# Altium PCB uThermometer.PcbDoc
Units mm, origin at the board's own origin, x right, y up, seen from the top; angles counter-clockwise.
Board outline 80.02 x 40.02 mm, 2 copper layers (Top Layer, Bottom Layer), stack 1.536 mm thick; 54 components, 47 nets, 178 pads, 44 vias.
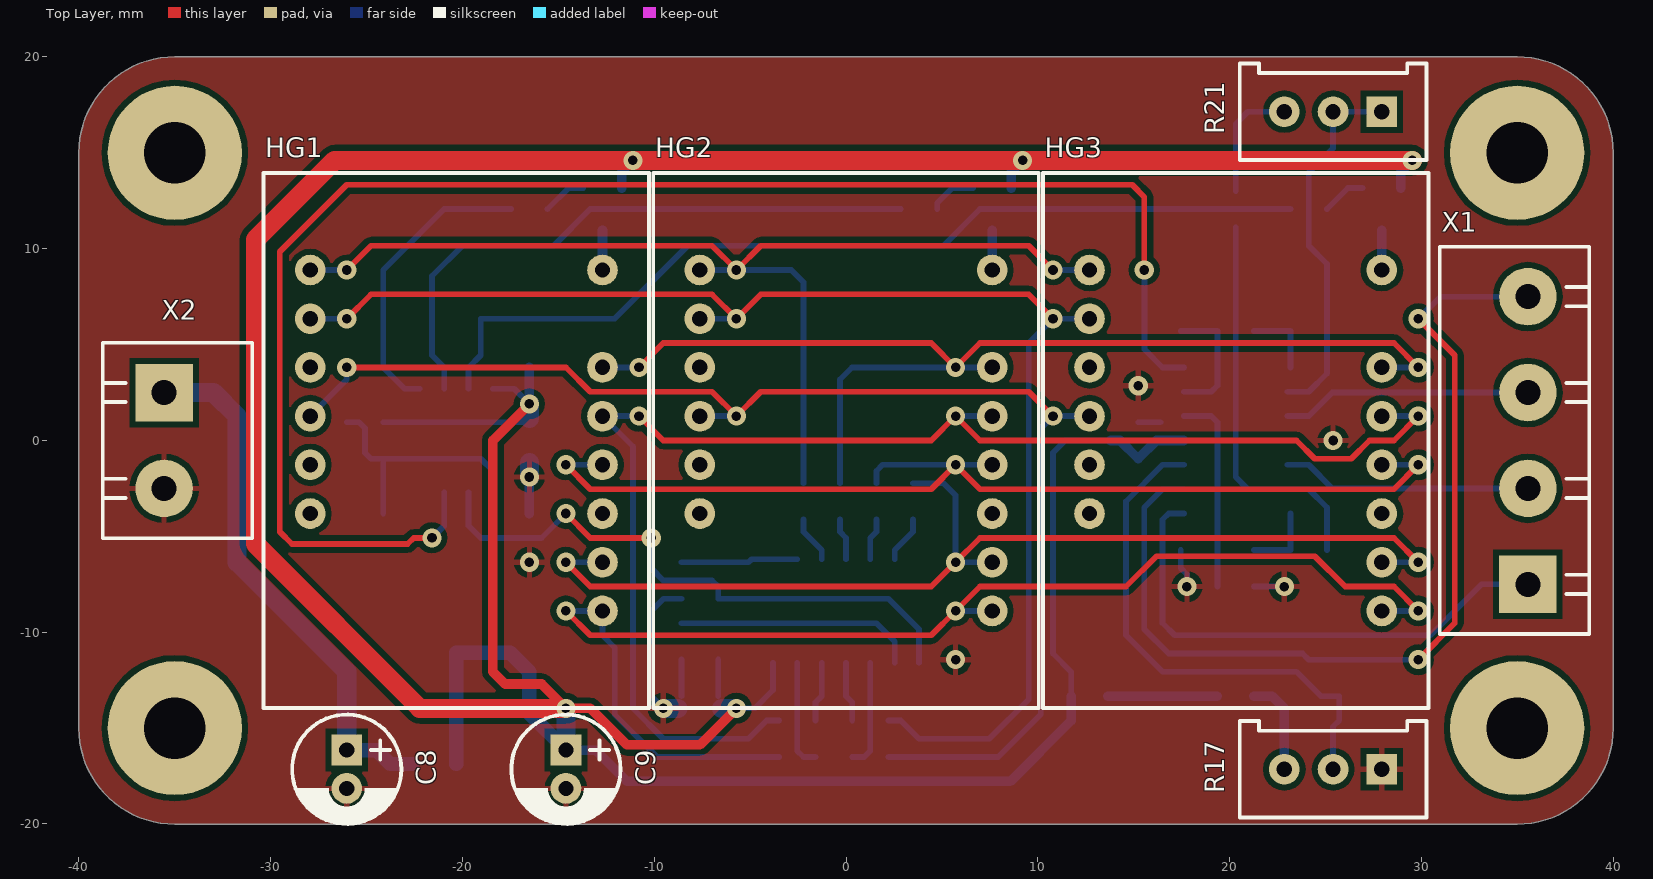
[diagram p0: Top Layer view]
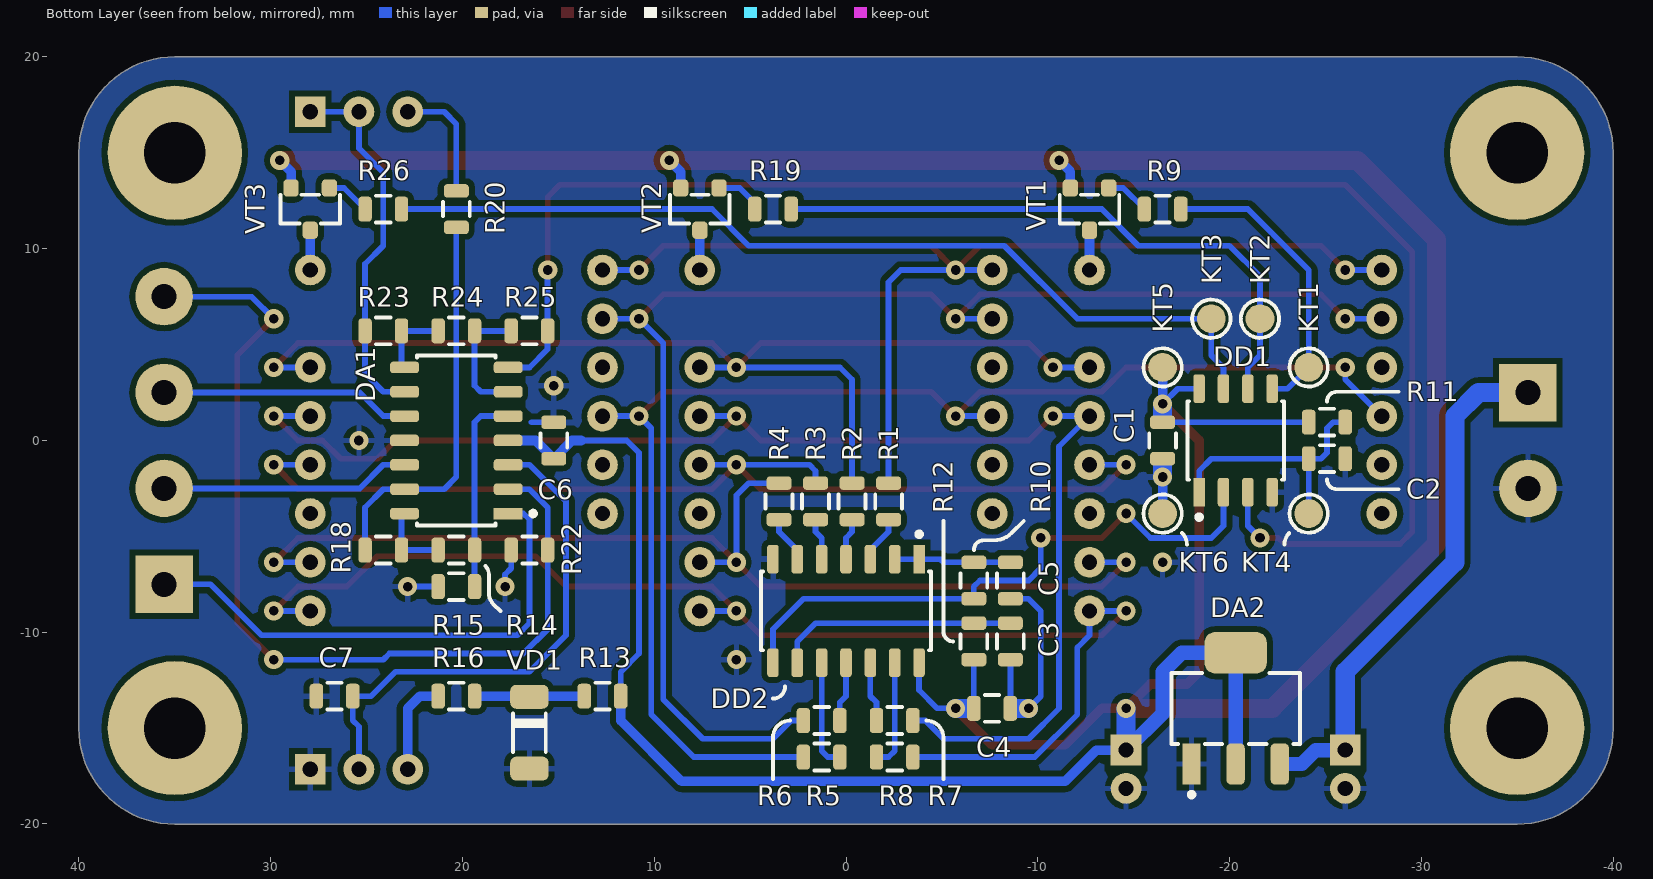
[diagram p1: Bottom Layer view, seen from below]
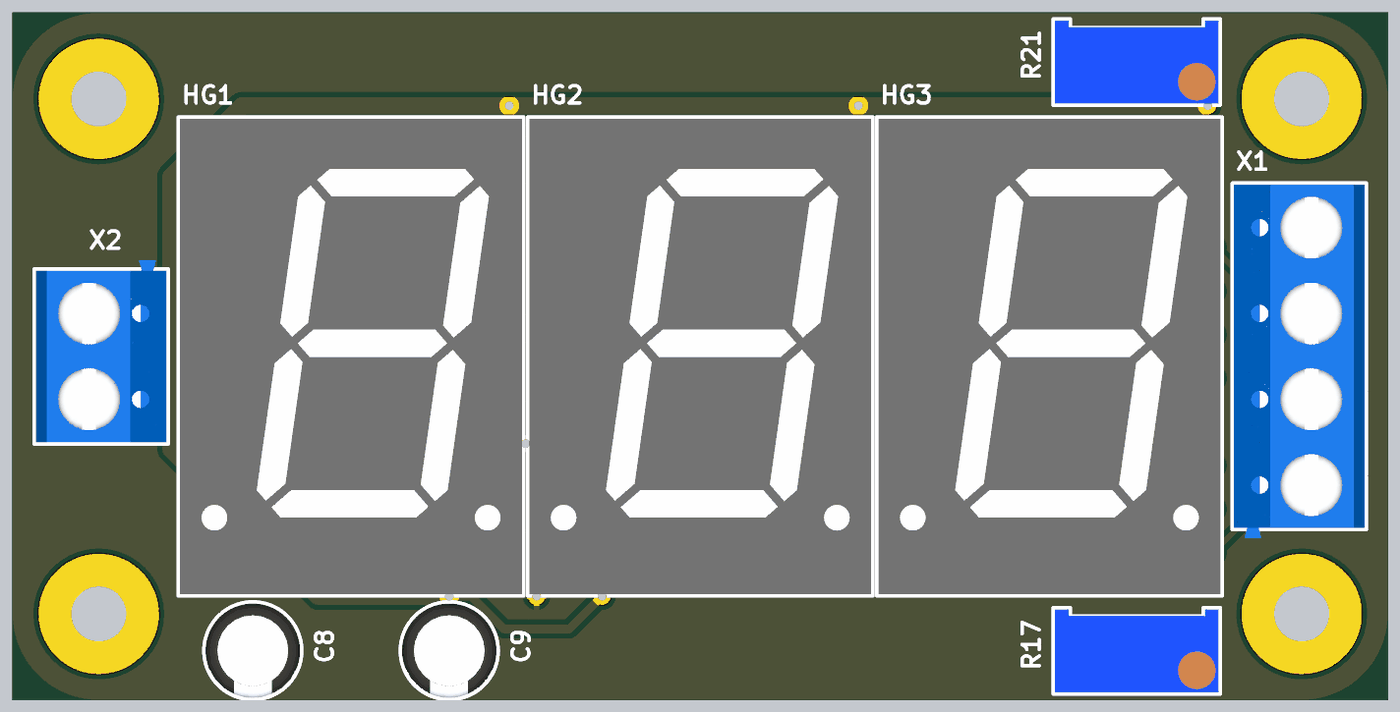
[diagram p2: 3D render of the assembled board from above, using the file's embedded part models]
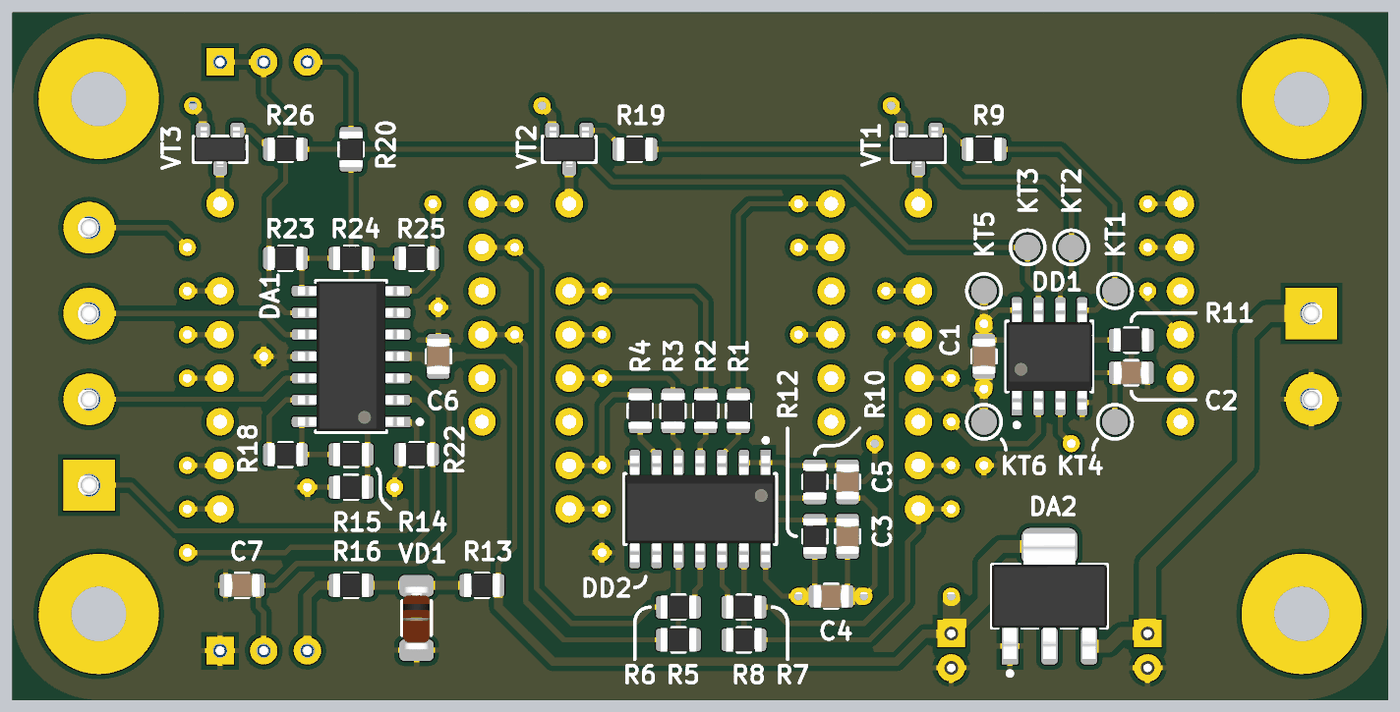
[diagram p3: 3D render of the assembled board from below, using the file's embedded part models]

## Layer stack, top to bottom
Top Solder: solder mask 0.0102, Solder Resist, Dk 3.5
Top Layer: signal copper 0.018
Dielectric1: core 1.5, FR-4, Dk 4.8
Bottom Layer: signal copper 0.018
Bottom Solder: solder mask 0.0102, Solder Resist, Dk 3.5

## Board outline
-40.01,-15 ccw(c-35,-15) -35,-20.01 35,-20.01 ccw(c35,-15) 40.01,-15 40.01,15 ccw(c35,15) 35,20.01 -35,20.01 cw(c-35,20) -35,20.01 ccw(c-35,20) -35,20.01 ccw(c-35,15) -40.01,15

## Design rules (kind name [scope] priority, off if disabled: settings)
Clearance Clearance_InPoly [InPoly] p1: gap=0.3 ignorepadtopadclearanceinfootprint=FALSE except(0: Arc-Hole Track-Hole SMDPad-Hole THPad-Hole Via-Hole Fill-Hole Poly-Hole Region-Hole Text-Hole)
Clearance [All] p2: gap=0.2 ignorepadtopadclearanceinfootprint=FALSE except(0: Arc-Hole Track-Hole SMDPad-Hole THPad-Hole Via-Hole Fill-Hole Poly-Hole Region-Hole Text-Hole)
PolygonConnect [All] p1: connectstyle=Relief reliefconductorwidth=0.3 reliefentries=4 polygonreliefangle="90 Angle" airgapwidth=0.3
RoutingVias [All] p1: holewidth=0.5 width=1 viastyle="Through Hole" minholewidth=0.5 minwidth=1 maxholewidth=0.5 maxwidth=1
SilkToSolderMaskClearance SilkscreenOverComponentPads [IsPad] p1: minsilkscreentomaskgap=0.254 clearancetoexposedcopper=TRUE
SolderMaskExpansion [All] p1: expansion=0.075
Width [All] p1: maxlimit=5 minlimit=0.2 preferedwidth=0.3
29 further rules are at their usual default settings.

## Components (designator, comment, footprint, x,y, rotation, side; value= is the part's Value field where it differs from the comment)
C1 "0,1" "Capacitor SMD0805" -16.51,0 r90 bottom
C2 "0,1" "Capacitor SMD0805" -25.082,-0.953 r0 bottom
C3 "0,1" "Capacitor SMD0805" -8.572,-10.477 r90 bottom
C4 "0,1" "Capacitor SMD0805" -7.62,-13.97 r0 bottom
C5 "0,01" "Capacitor SMD0805" -8.572,-7.302 r90 bottom
C6 "0,1" "Capacitor SMD0805" 15.24,0 r270 bottom
C7 "0,1" "Capacitor SMD0805" 26.67,-13.335 r180 bottom
C8 "100,0" "Capacitor R5V" -26.035,-17.145 r270 top
C9 "100,0" "Capacitor R5V" -14.605,-17.145 r270 top
DA1 "LM324D" "IC LM324D" 20.32,0 r0 bottom
DA2 "LM1117I-5.0" "IC LM1117I-5.0" -20.32,-13.97 r180 bottom
DD1 "ATTiny13A" "IC ATTiny13A" -20.32,0 r90 bottom
DD2 "74HC164D" "IC 74HC164D" 0,-8.89 r270 bottom
HG1 "LTS-3401VE" "Indicator LTS3401VE" -20.32,0 r0 top
HG2 "LTS-3401VE" "Indicator LTS3401VE" 0,0 r0 top
HG3 "LTS-3401VE" "Indicator LTS3401VE" 20.32,0 r0 top
KT1 "TestPoint 1" "TestPoint 1" -24.13,3.81 r180 bottom
KT2 "TestPoint 1" "TestPoint 1" -21.59,6.35 r180 bottom
KT3 "TestPoint 1" "TestPoint 1" -19.05,6.35 r180 bottom
KT4 "TestPoint 1" "TestPoint 1" -24.13,-3.81 r180 bottom
KT5 "TestPoint 1" "TestPoint 1" -16.51,3.81 r180 bottom
KT6 "TestPoint 1" "TestPoint 1" -16.51,-3.81 r180 bottom
R1 "300" "Resistor SMD0805" -2.222,-3.175 r270 bottom
R2 "300" "Resistor SMD0805" -0.318,-3.175 r270 bottom
R3 "300" "Resistor SMD0805" 1.587,-3.175 r270 bottom
R4 "300" "Resistor SMD0805" 3.492,-3.175 r270 bottom
R5 "300" "Resistor SMD0805" 1.27,-16.51 r180 bottom
R6 "300" "Resistor SMD0805" 1.27,-14.605 r180 bottom
R7 "300" "Resistor SMD0805" -2.54,-14.605 r0 bottom
R8 "300" "Resistor SMD0805" -2.54,-16.51 r0 bottom
R9 "10к" "Resistor SMD0805" -16.51,12.065 r0 bottom
R10 "1к" "Resistor SMD0805" -6.667,-7.302 r90 bottom
R11 "10к" "Resistor SMD0805" -25.082,0.953 r180 bottom
R12 "10к" "Resistor SMD0805" -6.667,-10.477 r90 bottom
R13 "2к" "Resistor SMD0805" 12.7,-13.335 r180 bottom
R14 "10к" "Resistor SMD0805" 20.32,-5.715 r180 bottom
R15 "10к" "Resistor SMD0805" 20.32,-7.62 r0 bottom
R16 "20к" "Resistor SMD0805" 20.32,-13.335 r0 bottom
R17 "10к" "Resistor 3296W" 25.4,-17.145 r180 top
R18 "10к" "Resistor SMD0805" 24.13,-5.715 r180 bottom
R19 "10к" "Resistor SMD0805" 3.81,12.065 r0 bottom
R20 "15к" "Resistor SMD0805" 20.32,12.065 r270 bottom
R21 "10к" "Resistor 3296W" 25.4,17.145 r180 top
R22 "100" "Resistor SMD0805" 16.51,-5.715 r180 bottom
R23 "10к" "Resistor SMD0805" 24.13,5.715 r0 bottom
R24 "10к" "Resistor SMD0805" 20.32,5.715 r180 bottom
R25 "10к" "Resistor SMD0805" 16.51,5.715 r180 bottom
R26 "10к" "Resistor SMD0805" 24.13,12.065 r0 bottom
VD1 "BZV55C3V6" "Zener BZV55C" 16.51,-15.24 r90 bottom
VT1 "BC857B" "Transistor SOT23" -12.7,12.065 r0 bottom
VT2 "BC857B" "Transistor SOT23" 7.62,12.065 r0 bottom
VT3 "BC857B" "Transistor SOT23" 27.94,12.065 r0 bottom
X1 "KLS2-301-5.00-04P" "Terminal KLS2-301-5.00-04P" 35.56,0 r90 top
X2 "KLS2-301-5.00-02P" "Terminal KLS2-301-5.00-02P" -35.56,0 r270 top

## Footprints (in the part's own frame and the unit in brackets; to place one, negate y for a bottom-side part, rotate by r counter-clockwise, add the part's x,y. Pads: shape width x height; smd on the part's side, far side on the other; paste and mask are expansions set on the pad)
"Capacitor R5V" [mm]
  rect 1.6x1.6 hole 0.8 mask+0.075: 1(-1,0)
  round 1.6 hole 0.8 mask+0.075: 2(1,0)
  silkscreen extent -2.85,-2.85 2.85,2.85, body extent -2.75,-2.75 2.75,2.75, height 12.5
"Capacitor SMD0805" [mm]
  rrect50% 0.7x1.3 smd mask+0.075: 1(-0.95,0) 2(0.95,0)
  silkscreen extent -0.38,-0.7 0.38,0.7, body extent -1.05,-0.68 1.05,0.67, height 0.75
"IC 74HC164D" [mm]
  rect 1.5x0.6 smd mask+0.075: 1(-2.7,3.81)
  rrect50% 1.5x0.6 smd mask+0.075: 2(-2.7,2.54) 3(-2.7,1.27) 4(-2.7,0) 5(-2.7,-1.27) 6(-2.7,-2.54) 7(-2.7,-3.81) 8(2.7,-3.81) 9(2.7,-2.54) 10(2.7,-1.27) 11(2.7,0) 12(2.7,1.27) 13(2.7,2.54) 14(2.7,3.81)
  silkscreen extent -4.12,-4.43 2.05,4.43, body extent -3.1,-4.39 3.1,4.36, height 1.75
"IC ATTiny13A" [mm]
  rect 1.5x0.6 smd mask+0.075: 1(-2.7,1.905)
  rrect50% 1.5x0.6 smd mask+0.075: 2(-2.7,0.635) 3(-2.7,-0.635) 4(-2.7,-1.905) 5(2.7,-1.905) 6(2.7,-0.635) 7(2.7,0.635) 8(2.7,1.905)
  silkscreen extent -4.12,-2.52 2.05,2.52, body extent -3.1,-2.5 3.1,2.5, height 1.75
"IC LM324D" [mm]
  rect 1.5x0.6 smd mask+0.075: 1(-2.7,3.81)
  rrect50% 1.5x0.6 smd mask+0.075: 2(-2.7,2.54) 3(-2.7,1.27) 4(-2.7,0) 5(-2.7,-1.27) 6(-2.7,-2.54) 7(-2.7,-3.81) 8(2.7,-3.81) 9(2.7,-2.54) 10(2.7,-1.27) 11(2.7,0) 12(2.7,1.27) 13(2.7,2.54) 14(2.7,3.81)
  silkscreen extent -4.12,-4.43 2.05,4.43, body extent -3.1,-4.39 3.1,4.36, height 1.75
"IC LM1117I-5.0" [mm]
  rect 0.95x2.15 smd mask+0.075: 1(-2.3,-2.9)
  rrect50% 0.95x2.15 smd mask+0.075: 2(0,-2.9) 3(2.3,-2.9)
  rrect50% 3.25x2.15 smd mask+0.075: 4(0,2.9)
  silkscreen extent -3.35,-4.62 3.35,1.85, body extent -3.35,-3.65 3.35,3.65, height 1.8
"Indicator LTS3401VE" [mm]
  round 1.6 hole 0.8 mask+0.075: 2(-7.62,8.89) 3(-7.62,6.35) 4(-7.62,3.81) 5(-7.62,1.27) 6(-7.62,-1.27) 7(-7.62,-3.81) 10(7.62,-8.89) 11(7.62,-6.35) 12(7.62,-3.81) 13(7.62,-1.27) 14(7.62,1.27) 15(7.62,3.81) 17(7.62,8.89)
  silkscreen extent -10.05,-13.94 10.05,13.94, body extent -9.95,-13.84 9.95,13.85, height 8.38
"Resistor 3296W" [mm]
  rect 1.6x1.6 hole 0.8 mask+0.075: 1(-2.54,0)
  round 1.6 hole 0.8 mask+0.075: 2(0,0) 3(2.54,0)
  silkscreen extent -4.86,-2.51 4.86,2.52, body extent -4.77,-2.42 4.76,2.41, height 11.55
"Resistor SMD0805" [mm]
  rrect50% 0.7x1.3 smd mask+0.075: 1(-0.95,0) 2(0.95,0)
  silkscreen extent -0.38,-0.7 0.38,0.7, body extent -1.05,-0.67 1.05,0.67, height 0.6
"Terminal KLS2-301-5.00-02P" [mm]
  rect 3x3 hole 1.3 mask+0.075: 1(-2.5,0)
  round 3 hole 1.3 mask+0.075: 2(2.5,0)
  silkscreen extent -5.1,-3.2 5.1,4.6, body extent -5.6,-3.1 5,4.5, height 10
"Terminal KLS2-301-5.00-04P" [mm]
  rect 3x3 hole 1.3 mask+0.075: 1(-7.5,0)
  round 3 hole 1.3 mask+0.075: 2(-2.5,0) 3(2.5,0) 4(7.5,0)
  silkscreen extent -10.1,-3.2 10.1,4.6, body extent -10.6,-3.1 10,4.5, height 10
"TestPoint 1" [mm]
  round 1.5 smd mask+0.075: 1(0,0)
  silkscreen extent -1,-1 1,1
"Transistor SOT23" [mm]
  rrect50% 0.8x0.9 smd mask+0.075: 1(-1,-1.1) 2(1,-1.1) 3(0,1.1)
  silkscreen extent -1.55,-0.75 1.55,0.75, body extent -1.5,-1.3 1.5,1.3, height 1.1
"Zener BZV55C" [mm]
  rrect50% 1.25x2 smd mask+0.075: 1(-1.875,0) 2(1.875,0)
  silkscreen extent -1,-0.85 1,0.85, body extent -1.85,-0.79 1.85,0.79, height 1.6

## Part data
C1 C2 C3 C4 C6 C7: library part "Capacitor C0805_100n"
C5: library part "Capacitor C0805_10n"
C8 C9: library part "Capacitor R5V"
DA1: library part "IC LM324D"
DA2: library part "IC LM1117I-5.0"
DD1: library part "IC ATTiny13A"
DD2: library part "IC 74HC164D"
HG1 HG2 HG3: library part "Indicator LTS-3401VE"
R1 R2 R3 R4 R5 R6 R7 R8: library part "Resistor R0805_300_5%"
R9 R11 R12 R14 R15 R18 R19 R23 R24 R25 R26: library part "Resistor R0805_10k_5%"
R10: library part "Resistor R0805_1k_5%"
R13: library part "Resistor R0805_2k_5%"
R16: library part "Resistor R0805_20k_5%"
R17 R21: library part "Resistor 3296W _10k_1%"
R20: library part "Resistor R0805_15k_5%"
R22: library part "Resistor R0805_100_5%"
VD1: library part "Zener BZV55C3V6"
VT1 VT2 VT3: library part "Transistor BC857B"
X1: library part "Terminal KLS2-301-5.00-04P"
X2: library part "Terminal KLS2-301-5.00-02P"

## Free pads (board coordinates)
  round 7 hole 3.2 mask+0.075: MH(-35,-15) MH(-35,15) MH(35,-15) MH(35,15)

## Via types
v1: diameter 1, hole 0.5, Top Layer to Bottom Layer, 44 vias

## Nets (pads, with @x,y where several pads share a name; then routed paths per layer and width w, separated by ;. In a path a pad name is that pad's centre, name@x,y a point inside that pad or via, vN(x,y) a via of type N, cw(c..) or ccw(c..) an arc to the next point about the centre after c; other vN are vias at no path point)
7SEG_1: DD1.5 KT1.1 R9.1 | length 15.4
  Bottom Layer w0.3: DD1.5 -23.02,2.7 KT1.1 -24.13,8.89 -20.955,12.065 R9.1
7SEG_2: DD1.6 KT2.1 R19.1 | length 32
  Bottom Layer w0.3: DD1.6 -20.955,3.81 -21.59,4.445 KT2.1 -21.59,8.572 -20.002,10.16 -15.24,10.16 -13.335,12.065 R19.1
7SEG_3: DD1.7 KT3.1 R26.1 | length 48.5
  Bottom Layer w0.3: DD1.7 -19.685,3.81 -19.05,4.445 KT3.1 -12.065,6.35 -8.255,10.16 5.08,10.16 6.985,12.065 R26.1
7SEG_A: HG1.2 HG2.2 HG3.2 R1.1 | length 58.9
  Top Layer w0.3: v1(-26.035,8.89) -24.765,10.16 -6.985,10.16 v1(-5.715,8.89) -4.445,10.16 9.525,10.16 v1(10.795,8.89)
  Bottom Layer w0.3: HG1.2 v1(-26.035,8.89) ; HG2.2 v1(-5.715,8.89) -2.857,8.89 -2.222,8.255 R1.1 ; v1(10.795,8.89) HG3.2
7SEG_B: HG1.15 HG2.15 HG3.15 R2.1 | length 60.2
  Top Layer w0.3: v1(-10.795,3.81) -9.525,5.08 4.445,5.08 v1(5.715,3.81) 6.985,5.08 28.575,5.08 v1(29.845,3.81)
  Bottom Layer w0.3: HG1.15 v1(-10.795,3.81) ; R2.1 -0.318,3.175 0.318,3.81 v1(5.715,3.81) HG2.15 ; HG3.15 v1(29.845,3.81)
7SEG_C: HG1.13 HG2.13 HG3.13 R3.1 | length 57.2
  Top Layer w0.3: v1(-14.605,-1.27) -13.335,-2.54 4.445,-2.54 v1(5.715,-1.27) 6.985,-2.54 28.575,-2.54 v1(29.845,-1.27)
  Bottom Layer w0.3: v1(-14.605,-1.27) HG1.13 ; R3.1 1.587,-1.587 1.905,-1.27 v1(5.715,-1.27) HG2.13 ; HG3.13 v1(29.845,-1.27)
7SEG_D: HG1.11 HG2.11 HG3.11 R4.1 | length 58.2
  Top Layer w0.3: v1(-14.605,-6.35) -13.335,-7.62 4.445,-7.62 v1(5.715,-6.35) 6.985,-5.08 28.575,-5.08 v1(29.845,-6.35)
  Bottom Layer w0.3: v1(-14.605,-6.35) HG1.11 ; R4.1 5.082,-2.225 5.715,-2.857 v1(5.715,-6.35) HG2.11 ; HG3.11 v1(29.845,-6.35)
7SEG_E: HG1.5 HG2.5 HG3.5 R5.1 | length 70.8
  Top Layer w0.3: v1(-26.035,3.81) -14.605,3.81 -13.335,2.54 -6.985,2.54 v1(-5.715,1.27) -4.445,2.54 9.525,2.54 v1(10.795,1.27)
  Bottom Layer w0.3: HG1.5 -26.035,3.175 v1(-26.035,3.81) ; HG2.5 v1(-5.715,1.27) ; R5.1 7.938,-16.51 10.16,-14.287 10.16,0.635 v1(10.795,1.27) HG3.5
7SEG_F: HG1.3 HG2.3 HG3.3 R6.1 | length 73.6
  Top Layer w0.3: v1(-26.035,6.35) -24.765,7.62 -6.985,7.62 v1(-5.715,6.35) -4.445,7.62 9.525,7.62 v1(10.795,6.35)
  Bottom Layer w0.3: HG1.3 v1(-26.035,6.35) ; HG2.3 v1(-5.715,6.35) ; R6.1 2.857,-14.605 3.81,-15.557 7.476,-15.557 9.525,-13.508 9.525,5.08 v1(10.795,6.35) HG3.3
7SEG_G: HG1.14 HG2.14 HG3.14 R7.1 | length 73.8
  Top Layer w0.3: v1(-10.795,1.27) -9.525,0 4.445,0 v1(5.715,1.27) 6.985,0 23.495,0 24.447,-0.953 26.352,-0.953 27.305,0 28.575,0 v1(29.845,1.27)
  Bottom Layer w0.3: v1(-10.795,1.27) HG1.14 -11.112,-0.318 -11.112,-13.97 -9.525,-15.557 -5.08,-15.557 -4.127,-14.605 R7.1 ; v1(5.715,1.27) HG2.14 ; HG3.14 v1(29.845,1.27)
7SEG_H: HG1.10 HG2.10 HG3.10 R8.1 | length 68.7
  Top Layer w0.3: v1(-14.605,-8.89) -13.335,-10.16 4.445,-10.16 v1(5.715,-8.89) 6.985,-7.62 14.605,-7.62 16.192,-6.032 24.447,-6.032 26.035,-7.62 28.575,-7.62 v1(29.845,-8.89)
  Bottom Layer w0.3: v1(-14.605,-8.89) HG1.10 -12.7,-10.16 -12.065,-10.795 -12.065,-14.287 -9.842,-16.51 R8.1 ; v1(5.715,-8.89) HG2.10 ; HG3.10 v1(29.845,-8.89)
ADC_T: DA1.7 DD1.3 R25.2 | length 82.8
  Top Layer w0.3: v1(-21.59,-5.08) -22.543,-5.08 -22.86,-5.397 -28.892,-5.397 -29.527,-4.763 -29.527,9.842 -26.035,13.335 14.922,13.335 15.557,12.7 v1(15.557,8.89)
  Bottom Layer w0.3: v1(-21.59,-5.08) -20.955,-4.445 DD1.3 ; v1(15.557,8.89) 15.56,8.888 R25.2 15.56,4.76 16.51,3.81 DA1.7
GND: C1.1 C2.1 C3.1 C4.1 C5.1 C6.1 C7.1 C8.2 C9.2 DA1.11 DA2.1 DD1.4 DD2.7 KT6.1 R15.2 R17.1 R22.1 VD1.1 X2.2 | length 17.3
  Bottom Layer w0.3: v1(-9.525,-13.97) -10.16,-13.335 -10.16,-8.89 -9.523,-8.253 C5.1 ; C4.1@-8.572,-13.968 C4.1 ; C4.1@-8.572,-13.333 C3.1 ; C6.1 16.4,0.95 ; R22.1 17.46,-6.665 17.78,-6.985 v1(17.78,-7.62) ; R15.2 v1(22.86,-7.62)
  Bottom Layer w0.5: KT6.1 v1(-16.51,-1.905)
  Bottom Layer w1: v1(-16.51,-1.905) C1.1@-16.51,-1.143 ; v1(-9.525,-13.97) C4.1@-8.763,-13.97
  other v1: 5.715,-11.43 -16.51,-6.35 25.4,0 15.24,2.857
MCU_R: C2.2 DD1.1 KT4.1 R11.2 | length 13.4
  Bottom Layer w0.3: R11.2 -25.4,0.953 -25.082,0.635 -25.082,-0.635 -24.765,-0.953 C2.2 C2.2@-24.13,-0.953 ; KT4.1 C2.2@-24.13,-0.953 ; DD1.1 -18.415,-1.587 -19.05,-0.953 C2.2@-24.13,-0.953
NetC7_2: C7.2 DA1.3 R17.2 | length 27.2
  Bottom Layer w0.3: DA1.3 16.51,-1.27 14.605,-3.175 14.605,-10.16 16.51,-12.065 23.495,-12.065 24.765,-13.335 C7.2 25.72,-14.603 25.4,-14.922 R17.2
NetC8_1: C8.1 DA2.3 X2.1 | length 27.8
  Bottom Layer w0.75: C8.1 -24.495,-16.145 -23.77,-16.87 DA2.3
  Bottom Layer w1: X2.1 -32.98,2.5 -31.75,1.27 -31.75,-6.35 -26.035,-12.065 C8.1
NetDA1_1: DA1.1 X1.1 | length 27.1
  Bottom Layer w0.3: DA1.1 16.828,-3.81 16.51,-4.127 16.51,-9.525 17.145,-10.16 30.48,-10.16 33.14,-7.5 X1.1
NetDA1_2: DA1.2 R22.2 X1.4 | length 49.3
  Top Layer w0.3: v1(29.845,-11.43) 31.75,-9.525 31.75,4.445 v1(29.845,6.35)
  Bottom Layer w0.3: DA1.2 16.51,-2.54 15.557,-3.492 15.557,-9.842 16.828,-11.112 23.812,-11.112 24.13,-11.43 v1(29.845,-11.43) ; v1(29.845,6.35) 30.995,7.5 X1.4
NetDA1_5: DA1.5 R14.2 R15.1 | length 10.5
  Bottom Layer w0.3: DA1.5 19.05,1.27 19.37,0.95 R14.2 R15.1
NetDA1_6: DA1.6 R24.2 R25.1 | length 6.6
  Bottom Layer w0.3: R25.1 R24.2 19.37,2.86 19.05,2.54 DA1.6
NetDA1_8: DA1.8 R23.1 R24.1 | length 3.8
  Bottom Layer w0.3: R24.1 R23.1 DA1.8@23.18,3.81
NetDA1_9: DA1.9 R21.1 R21.2 R23.2 | length 19.6
  Bottom Layer w0.3: DA1.9 24.13,2.54 25.08,3.49 R23.2 25.08,9.21 24.13,10.16 24.13,13.97 25.4,15.24 R21.2 R21.1
NetDA1_10: DA1.10 X1.3 | length 13
  Bottom Layer w0.3: DA1.10 24.13,1.27 25.36,2.5 X1.3
NetDA1_12: DA1.12 X1.2 | length 13
  Bottom Layer w0.3: DA1.12 24.13,-1.27 25.36,-2.5 X1.2
NetDA1_13: DA1.13 R18.1 R20.2 | length 20.7
  Bottom Layer w0.3: R20.2 20.32,-1.905 20.955,-2.54 DA1.13 24.13,-2.54 25.08,-3.49 R18.1
NetDA1_14: DA1.14 R14.1 R18.2 | length 3.8
  Bottom Layer w0.3: R14.1 R18.2 DA1.14@23.18,-3.81
NetDD2_3: DD2.3 R1.2 | length 2.5
  Bottom Layer w0.3: R1.2 -2.222,-4.763 -1.27,-5.715 DD2.3
NetDD2_4: DD2.4 R2.2 | length 2.2
  Bottom Layer w0.3: R2.2 -0.318,-4.763 0,-5.08 DD2.4
NetDD2_5: DD2.5 R3.2 | length 2.2
  Bottom Layer w0.3: DD2.5 1.27,-5.08 1.587,-4.763 R3.2
NetDD2_6: DD2.6 R4.2 | length 2.5
  Bottom Layer w0.3: DD2.6 2.54,-5.715 3.492,-4.763 R4.2
NetDD2_10: DD2.10 R5.2 | length 5.7
  Bottom Layer w0.3: R5.2 0.953,-16.51 1.27,-16.192 DD2.10
NetDD2_11: DD2.11 R6.2 | length 3.1
  Bottom Layer w0.3: DD2.11 0,-13.335 0.32,-13.655 R6.2
NetDD2_12: DD2.12 R7.2 | length 3.1
  Bottom Layer w0.3: R7.2 -1.59,-13.655 -1.27,-13.335 DD2.12
NetDD2_13: DD2.13 R8.2 | length 5.7
  Bottom Layer w0.3: DD2.13 -2.54,-16.192 -2.222,-16.51 R8.2
NetHG1_17: HG1.17 VT1.3 | length 2.1
  Bottom Layer w0.5: HG1.17 VT1.3
NetHG2_17: HG2.17 VT2.3 | length 2.1
  Bottom Layer w0.5: HG2.17 VT2.3
NetHG3_17: HG3.17 VT3.3 | length 2.1
  Bottom Layer w0.5: HG3.17 VT3.3
NetR9_2: R9.2 VT1.1 | length 2.3
  Bottom Layer w0.3: R9.2 -14.46,13.165 VT1.1
NetR13_1: R13.1 R16.1 VD1.2 | length 5.7
  Bottom Layer w0.5: R13.1 R16.1
NetR16_2: R16.2 R17.3 | length 5
  Bottom Layer w0.5: R16.2 22.225,-13.335 22.86,-13.97 R17.3
NetR19_2: R19.2 VT2.1 | length 2.5
  Bottom Layer w0.3: R19.2 4.76,12.38 5.545,13.165 VT2.1
NetR20_1: R20.1 R21.3 | length 6.3
  Bottom Layer w0.3: R20.1 20.32,16.51 20.955,17.145 R21.3
NetR26_2: R26.2 VT3.1 | length 2.3
  Bottom Layer w0.3: R26.2 26.18,13.165 VT3.1
RG_C: DD1.2 DD2.8 R10.1 | length 31.6
  Top Layer w0.3: v1(-14.605,-3.81) -13.335,-5.08 v1(-10.16,-5.08)
  Bottom Layer w0.3: DD1.2 -19.685,-4.445 -19.05,-5.08 -15.875,-5.08 v1(-14.605,-3.81) ; v1(-10.16,-5.08) -10.16,-6.667 -9.525,-7.302 -6.985,-7.302 -6.667,-7.62 R10.1 2.22,-8.253 3.81,-9.842 DD2.8
RG_D: C5.2 DD2.1 DD2.2 R10.2 | length 6.1
  Bottom Layer w0.3: C5.2 R10.2 -5.08,-6.352 ; -5.08,-6.35 -4.92,-6.19 DD2.1 DD2.2
RG_R: C3.2 DD2.9 R12.2 | length 12.6
  Bottom Layer w0.3: C3.2 R12.2 1.59,-9.527 2.54,-10.477 DD2.9
VCC: C1.2 C4.2 C6.2 C9.1 DA1.4 DA2.2 DA2.4 DD1.8 DD2.14 KT5.1 R11.1 R12.1 R13.2 VT1.2 VT2.2 VT3.2 | length 219.1
  Top Layer w0.5: v1(-16.51,1.905) -18.415,0 -18.415,-12.065 -17.78,-12.7 -15.875,-12.7 v1(-14.605,-13.97) -13.335,-13.97 -11.43,-15.875 -7.62,-15.875 v1(-5.715,-13.97)
  Top Layer w1: v1(-14.605,-13.97) -22.225,-13.97 -30.797,-5.397 -30.797,10.477 -26.67,14.605 v1(-11.112,14.605) v1(9.207,14.605) v1(29.527,14.605)
  Bottom Layer w0.3: R11.1@-24.132,0.95 C1.2 ; DD1.8 -17.305,2.7 v1(-16.51,1.905) ; C4.2@-6.667,-13.333 R12.1 ; v1(-5.715,-13.97) -4.763,-13.97 -3.81,-13.018 DD2.14 ; R13.2 11.75,-12.067 10.795,-11.112 10.795,-0.635 11.43,0 13.811,0
  Bottom Layer w0.5: v1(-16.51,1.905) KT5.1 ; C9.1 -13.065,-16.145 -11.43,-17.78 8.572,-17.78 11.747,-14.605 R13.2@11.747,-13.335 ; VT1.2 -11.7,14.018 v1(-11.112,14.605) ; VT2.2 8.62,14.018 v1(9.207,14.605) ; 13.811,0 14.287,0 15.239,-0.951 C6.2 16.19,0 DA1.4 ; VT3.2 28.94,14.018 v1(29.527,14.605)
  Bottom Layer w0.75: DA2.2 DA2.4 -17.505,-11.07 -16.51,-12.065 -16.51,-14.24 C9.1
  Bottom Layer w1: C1.2@-16.51,1.143 v1(-16.51,1.905) ; C9.1 v1(-14.605,-13.97) ; C4.2@-6.477,-13.97 v1(-5.715,-13.97)
pads on no net: HG1.4 HG1.6 HG1.7 HG1.12 HG2.4 HG2.6 HG2.7 HG2.12 HG3.4 HG3.6 HG3.7 HG3.12

## Polygon pours and split planes (outlines as drawn)
GND on Bottom Layer "Bottom Layer-GND" (solid, remove dead copper, pour order 11): -35,20 35,20 cw(c35,15) 40,15 40,-15 cw(c35,-15) 35,-20 -35,-20 cw(c-35,-15) -40,-15 -40,15 cw(c-35,15)
GND on Top Layer "Top Layer-GND" (solid, remove dead copper, pour order 9): -35,20 35,20 cw(c35,15) 40,15 40,-15 cw(c35,-15) 35,-20 -35,-20 cw(c-35,-15) -40,-15 -40,15 cw(c-35,15)

## Other copper
Bottom Layer:
  pour cut-out: 15.557,6.35 22.86,6.35 22.86,-3.175 24.765,-3.175 24.765,-6.35 22.86,-6.35 22.86,-7.302 22.543,-7.302 22.543,-8.255 18.098,-8.255 18.098,-7.302 17.78,-7.302 17.78,5.08 15.557,5.08
  pour cut-out: -22.543,2.54 -16.51,2.54 -16.51,0.635 -15.875,0.635 -15.875,-0.635 -16.51,-0.635 -16.51,-4.763 -19.685,-4.763 -19.685,-2.54 -22.543,-2.54
  pour cut-out: 3.175,-6.35 3.175,-10.16 3.81,-10.16 3.81,-11.43 -3.81,-11.43 -3.81,-13.97 -10.405,-13.97 -10.405,-6.35

## Silkscreen, mask and mechanical layers (free items; w line width, h text height)
Bottom Overlay:
  lines w0.2: -28.829,-2.54 -25.59,-2.54 ccw(c-25.59,-2.032) -25.082,-2.032 ; -28.829,2.54 -25.59,2.54 cw(c-25.59,2.032) -25.082,2.032 ; -23.114,-4.826 cw(c-23.727,-5.439) -22.86,-5.439 ; -17.78,-5.439 cw(c-16.913,-5.439) -17.526,-4.826 ; -9.271,-4.191 -8.636,-4.826 ccw(c-7.716,-3.906) -7.716,-5.207 -7.175,-5.207 cw(c-7.175,-5.715) -6.667,-5.715 ; -5.588,-10.477 ccw(c-5.588,-9.97) -5.08,-9.97 -5.08,-4.191 ; -5.08,-17.653 -5.08,-15.494 cw(c-4.191,-15.494) -4.191,-14.605 ; 2.921,-14.605 cw(c2.921,-15.494) 3.81,-15.494 3.81,-17.653 ; 3.175,-12.827 ccw(c3.81,-12.827) 3.81,-13.462 ; 18.025,-8.9 18.375,-8.55 ccw(c17.771,-7.946) 18.625,-7.946 18.625,-6.972 cw(c19.222,-6.972) 18.8,-6.55
Mechanical 15:
  lines w0.02: -35,20 ccw(c-35,20) -35,20 ; -35,20 ccw(c-35,15) -40,15 -40,-15 ccw(c-35,-15) -35,-20 35,-20 ccw(c35,-15) 40,-15 40,15 ccw(c35,15) 35,20 -35,20